# Altium PCB MotorBoard.PcbDoc
Units mil, origin at the board's own origin, x right, y up, seen from the top; angles counter-clockwise.
Board outline 2950 x 3775 mil, 2 copper layers (Top Layer, Bottom Layer); 65 components, 34 nets, 209 pads, 26 vias.
Unrouted connection lines stored in the file: 1.
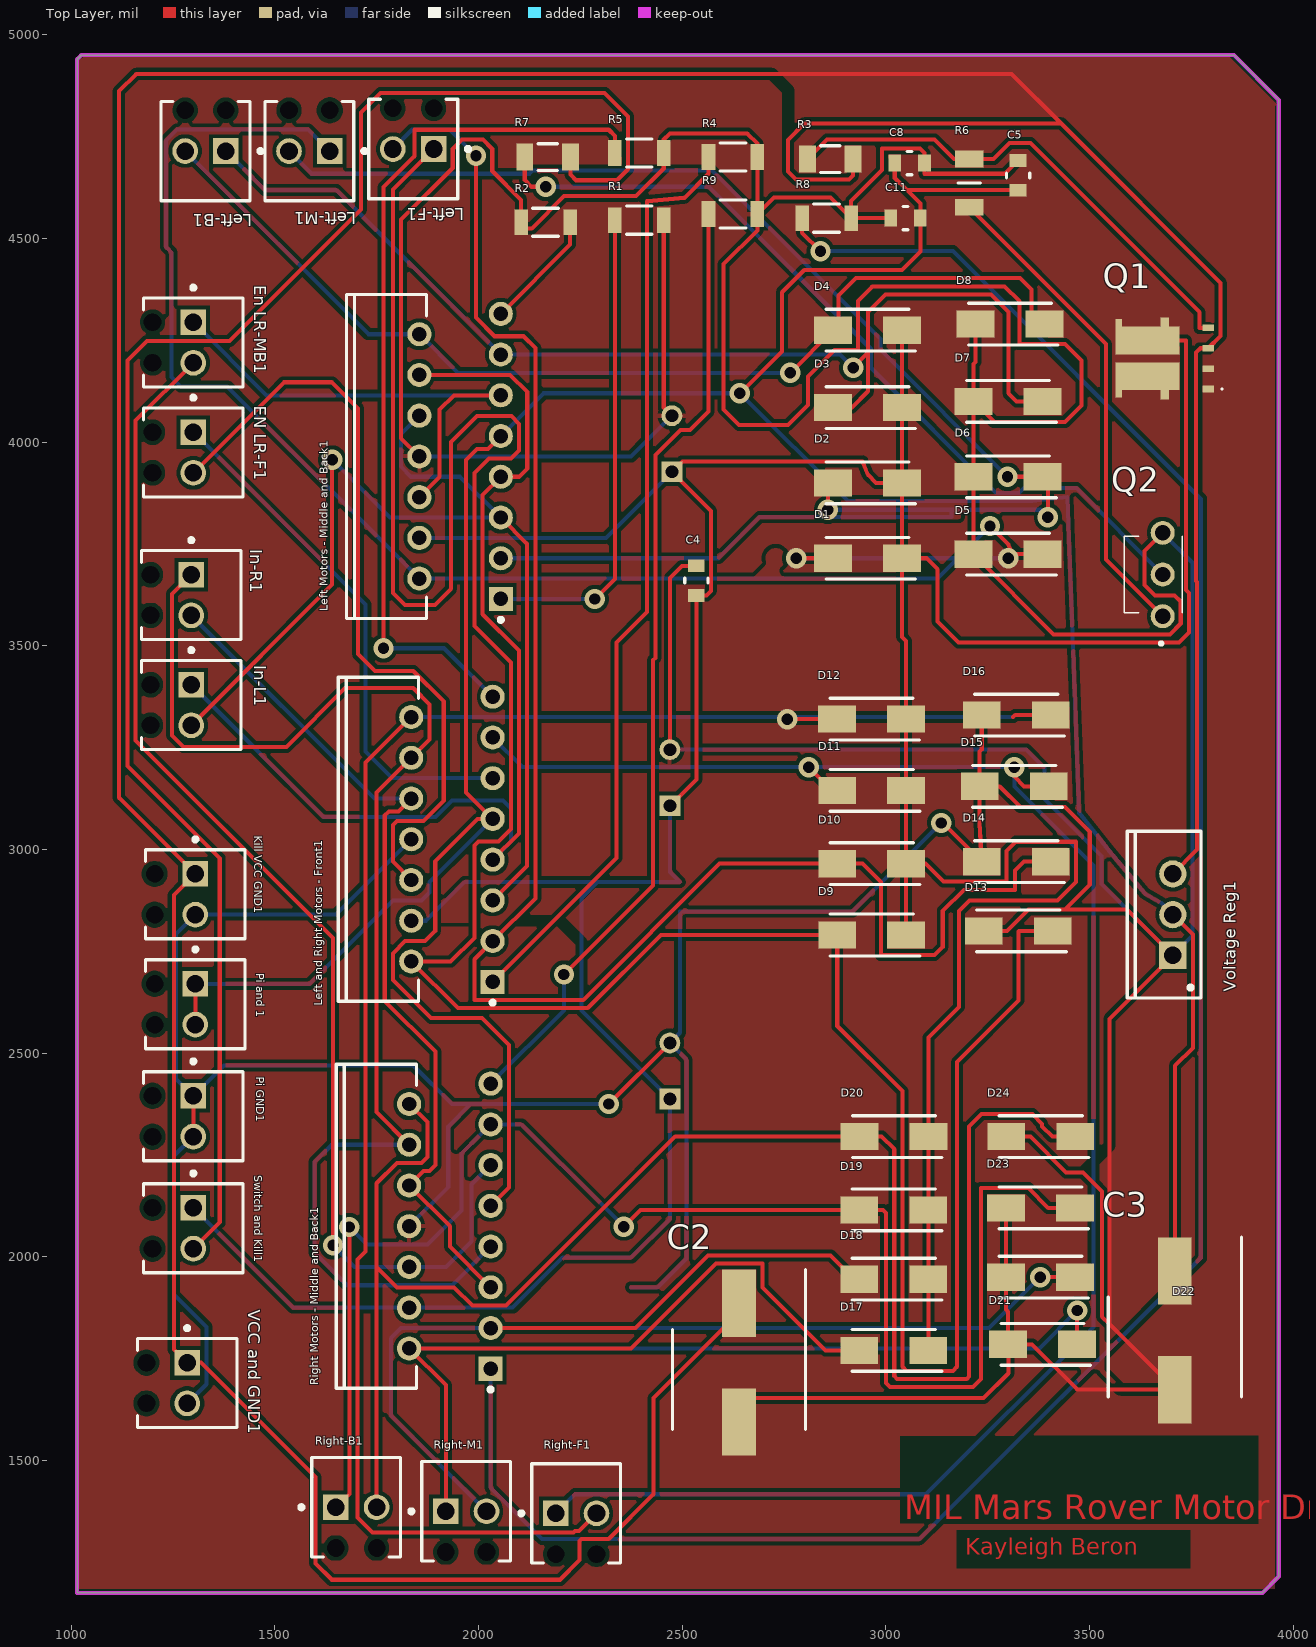
[diagram p0: Top Layer view]
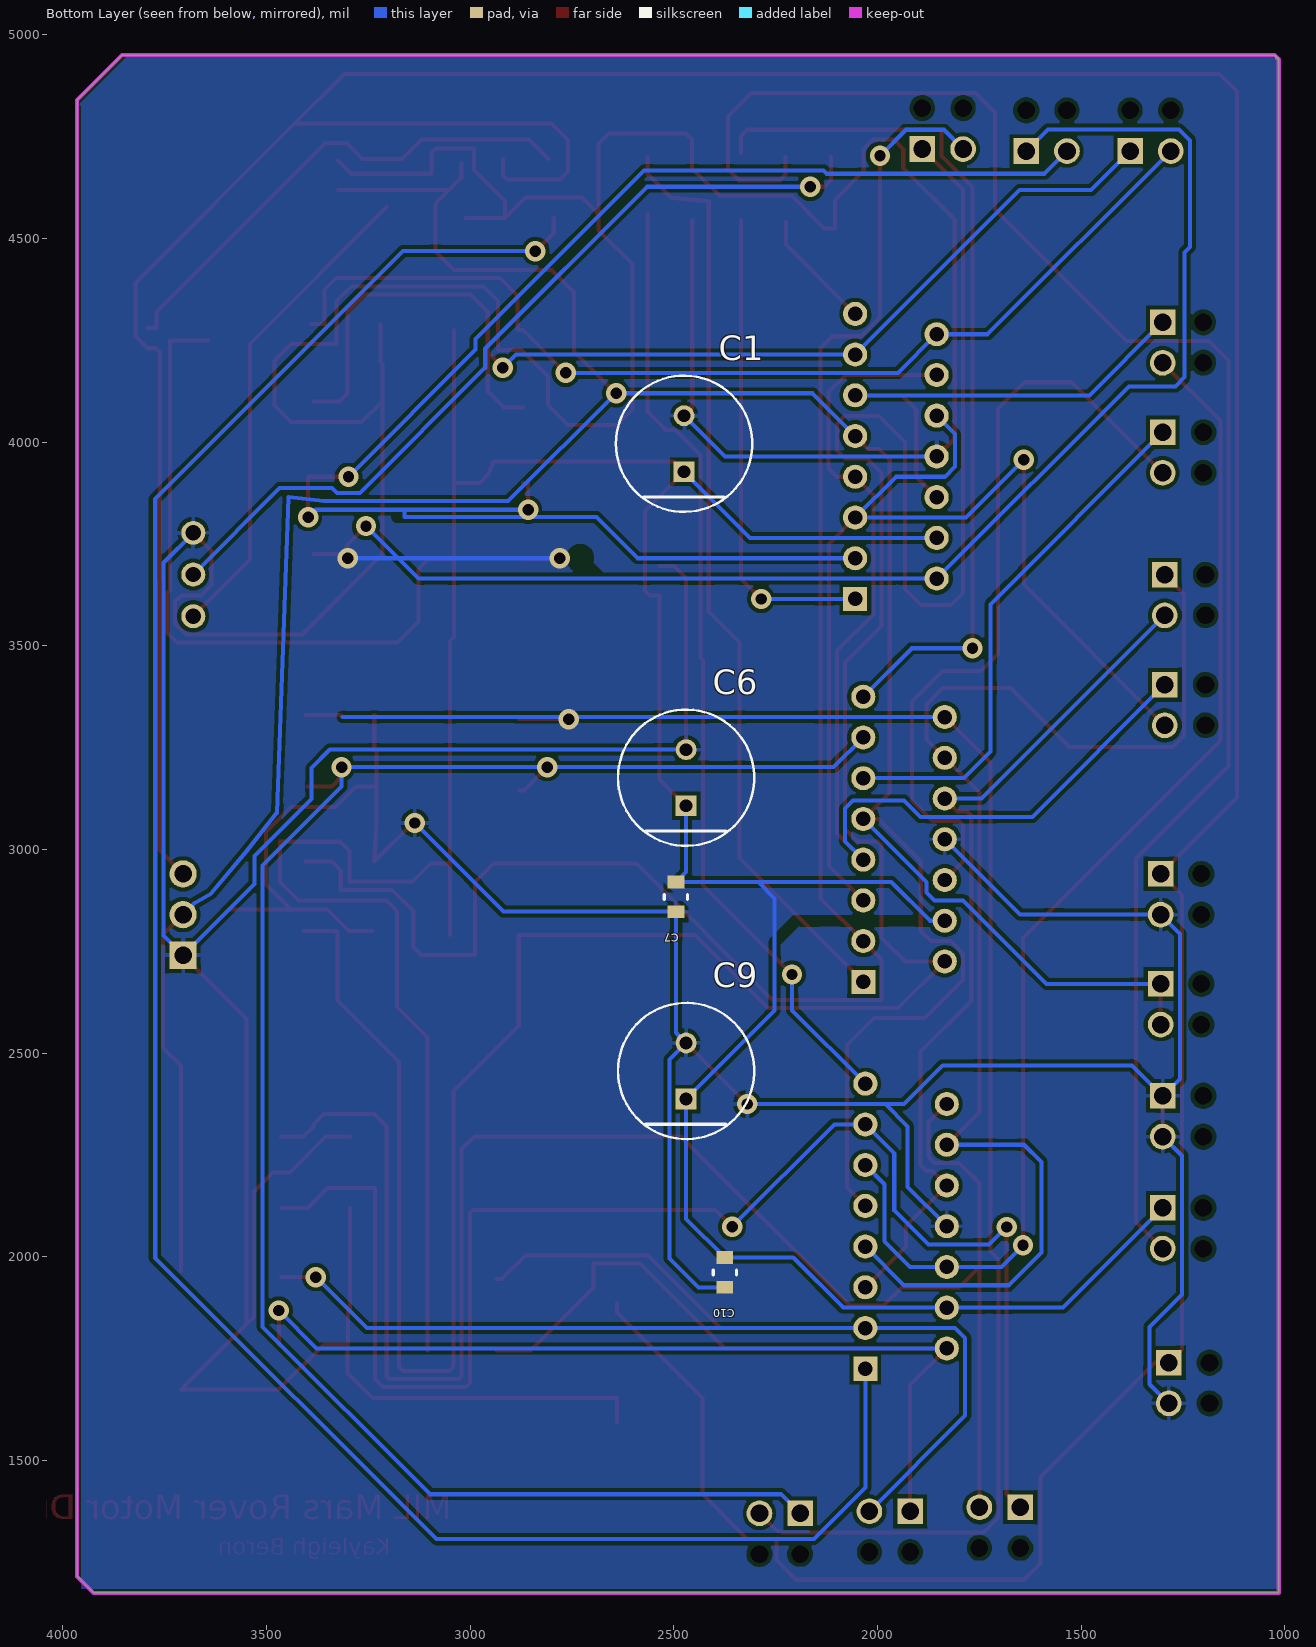
[diagram p1: Bottom Layer view, seen from below]
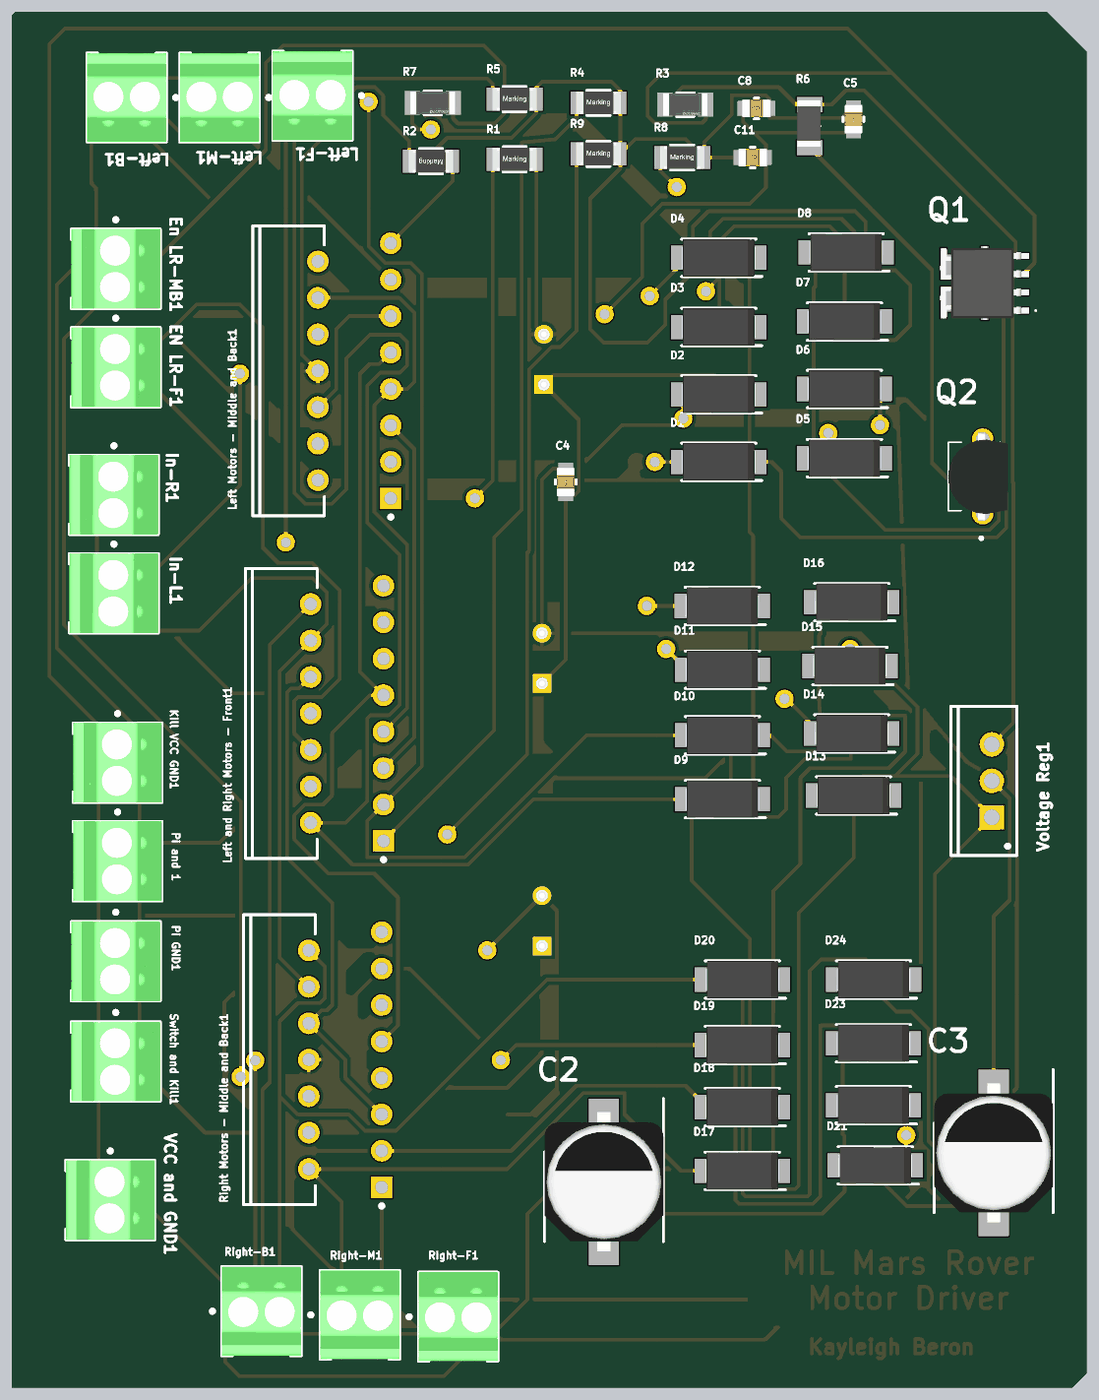
[diagram p2: 3D render of the assembled board from above, using the file's embedded part models]
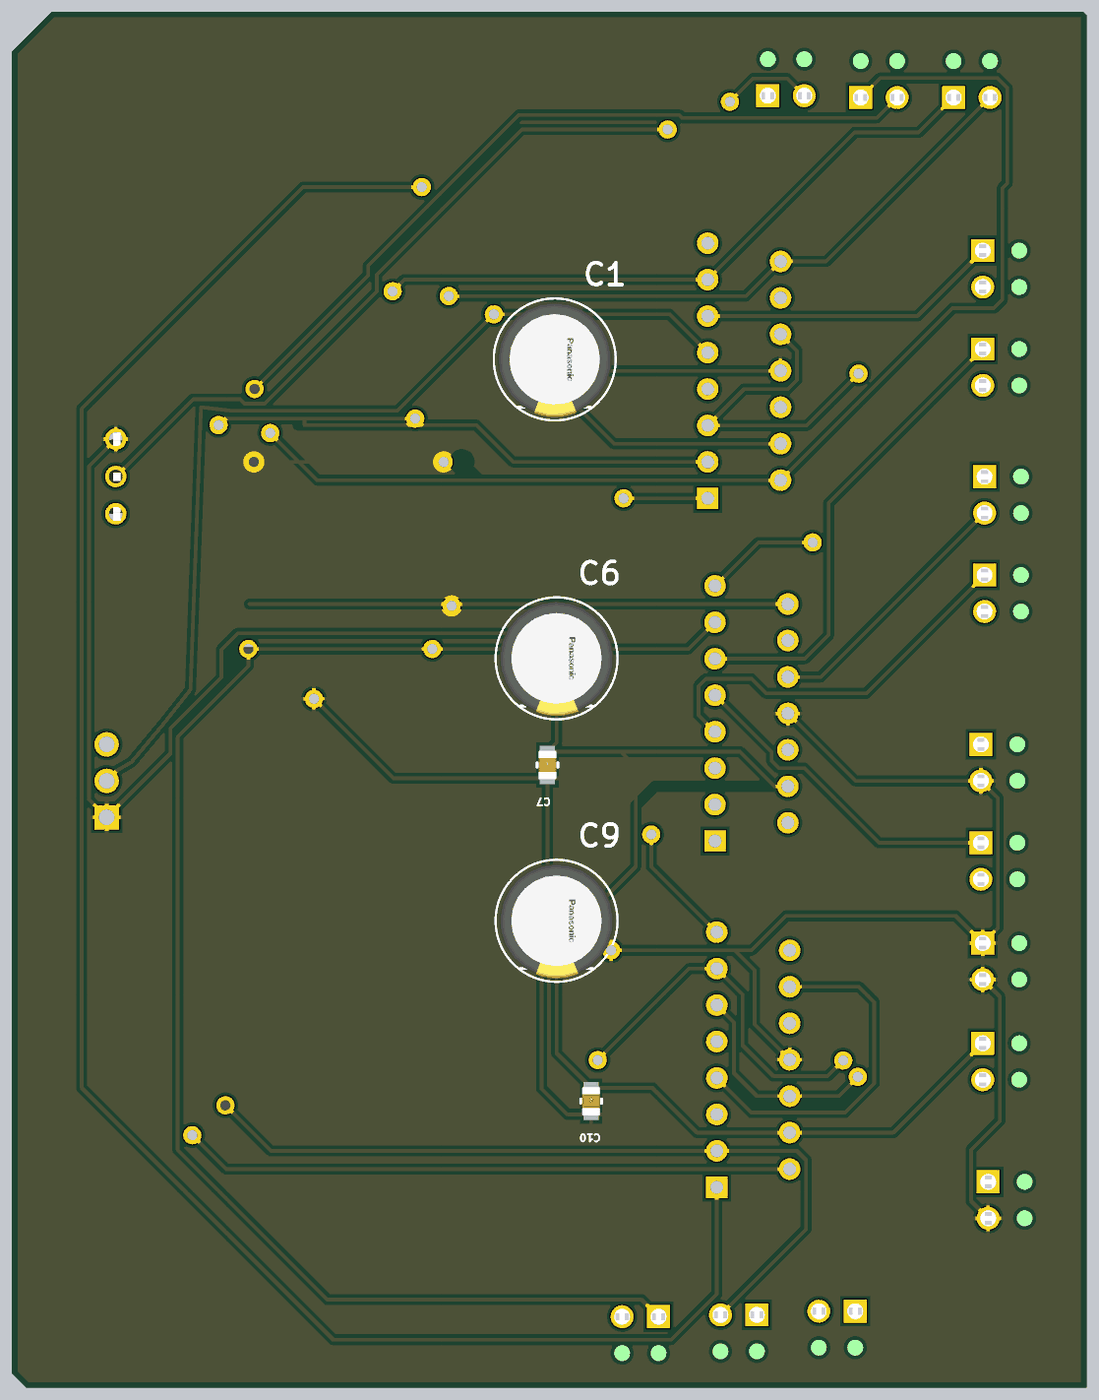
[diagram p3: 3D render of the assembled board from below, using the file's embedded part models]

## Layer stack, top to bottom
Top Solder: solder mask 0.4, Solder Resist, Dk 3.5
Top Layer: signal copper 1.4
Dielectric 1: dielectric 12.6, FR-4, Dk 4.8
Bottom Layer: signal copper 1.4
Bottom Solder: solder mask 0.4, Solder Resist, Dk 3.5

## Board outline
1015,1175 1015,4940 1025,4950 3855,4950 3965,4840 3965,1215 3925,1175

## Design rules (kind name [scope] priority, off if disabled: settings)
Clearance [All] p1: gap=10 ignorepadtopadclearanceinfootprint=FALSE except(0: Arc-Hole Track-Hole SMDPad-Hole THPad-Hole Via-Hole Fill-Hole Poly-Hole Region-Hole Text-Hole)
PolygonConnect [All] p1: connectstyle=Relief reliefconductorwidth=10 reliefentries=4 polygonreliefangle="90 Angle" airgapwidth=10
RoomDefinition PCB1 [InComponentClass('PCB1')] p1: confinementstyle=ConfineIn formatcopy=TRUE lockcomponents=FALSE outline 7405,864.65 25720,864.65 25720,2134.65 7405,2134.65
RoutingVias [All] p1: holewidth=28 width=50 viastyle="Through Hole" minholewidth=28 minwidth=50 maxholewidth=28 maxwidth=50
SolderMaskExpansion [All] p1: expansion=4 istentingtop=FALSE
Width [All] p1: maxlimit=10 minlimit=10 preferedwidth=10
30 further rules are at their usual default settings.

## Components (designator, comment, footprint, x,y, rotation, side; value= is the part's Value field where it differs from the comment)
C1 "EEU-FC1V221L" FP-EEU-FC1V221L-MFG 2475,3996.1 r90 bottom value=220uF
C2 "EEE-TG2A100P" CAPAE830X1050N 2640,1740 r270 top
C3 "EEE-TG2A100P" CAPAE830X1050N 3710,1819.33 r270 top
C4 "100nF" FP-C2012-125-0_2-MFG 2535,3660 r90 top
C5 "100nF" FP-C2012-125-0_2-MFG 3325,4655 r90 top
C6 "EEU-FC1V221L" FP-EEU-FC1V221L-MFG 2470,3176.1 r90 bottom value=220uF
C7 "100nF" FP-C2012-125-0_2-MFG 2495,2883.58 r270 bottom
C8 "100nF" FP-C2012-125-0_2-MFG 3058.58,4685 r0 top
C9 "EEU-FC1V221L" FP-EEU-FC1V221L-MFG 2470,2456.1 r90 bottom value=220uF
C10 "100nF" FP-C2012-125-0_2-MFG 2375,1961.42 r270 bottom
C11 "100nF" FP-C2012-125-0_2-MFG 3048.58,4550 r0 top
D1 "CMR1U-02M_TR13_PBFREE" DIOM5226X262N 2955.35,3715 r180 top
D2 "CMR1U-02M_TR13_PBFREE" DIOM5226X262N 2955.35,3900 r180 top
D3 "CMR1U-02M_TR13_PBFREE" DIOM5226X262N 2955.35,4085 r180 top
D4 "CMR1U-02M_TR13_PBFREE" DIOM5226X262N 2955.35,4275 r180 top
D5 "CMR1U-02M_TR13_PBFREE" DIOM5226X262N 3300.35,3725 r180 top
D6 "CMR1U-02M_TR13_PBFREE" DIOM5226X262N 3300.35,3915 r180 top
D7 "CMR1U-02M_TR13_PBFREE" DIOM5226X262N 3300.35,4100 r180 top
D8 "CMR1U-02M_TR13_PBFREE" DIOM5226X262N 3305,4290 r180 top
D9 "CMR1U-02M_TR13_PBFREE" DIOM5226X262N 2965.35,2790 r180 top
D10 "CMR1U-02M_TR13_PBFREE" DIOM5226X262N 2965.35,2965 r180 top
D11 "CMR1U-02M_TR13_PBFREE" DIOM5226X262N 2965.35,3145 r180 top
D12 "CMR1U-02M_TR13_PBFREE" DIOM5226X262N 2965,3320 r180 top
D13 "CMR1U-02M_TR13_PBFREE" DIOM5226X262N 3325.35,2800 r180 top
D14 "CMR1U-02M_TR13_PBFREE" DIOM5226X262N 3320.35,2970 r180 top
D15 "CMR1U-02M_TR13_PBFREE" DIOM5226X262N 3315.35,3155 r180 top
D16 "CMR1U-02M_TR13_PBFREE" DIOM5226X262N 3320.35,3330 r180 top
D17 "CMR1U-02M_TR13_PBFREE" DIOM5226X262N 3020,1770 r180 top
D18 "CMR1U-02M_TR13_PBFREE" DIOM5226X262N 3020,1945 r180 top
D19 "CMR1U-02M_TR13_PBFREE" DIOM5226X262N 3020,2115 r180 top
D20 "CMR1U-02M_TR13_PBFREE" DIOM5226X262N 3020.35,2295 r180 top
D21 "CMR1U-02M_TR13_PBFREE" DIOM5226X262N 3385,1785 r180 top
D22 "CMR1U-02M_TR13_PBFREE" DIOM5226X262N 3380,1950 r180 top
D23 "CMR1U-02M_TR13_PBFREE" DIOM5226X262N 3380,2120 r180 top
D24 "CMR1U-02M_TR13_PBFREE" DIOM5226X262N 3380.35,2295 r180 top
"EN LR-F1" "1725656" PHOE-1725656-2 1300,3974.65 r270 top
"En LR-MB1" "1725656" PHOE-1725656-2 1300,4244.65 r270 top
In-L1 "1725656" PHOE-1725656-2 1295,3354.65 r270 top
In-R1 "1725656" PHOE-1725656-2 1295,3624.65 r270 top
"Kill VCC GND1" "1725656" PHOE-1725656-2 1305,2890 r270 top
"Left and Right Motors - Front1" "L298N" STM-FM-15 1935,3025 r180 top
"Left Motors - Middle and Back1" "L298N" STM-FM-15 1955,3965 r180 top
Left-B1 "1725656" PHOE-1725656-2 1330,4714.65 r180 top
Left-F1 "1725656" PHOE-1725656-2 1840,4719.65 r180 top
Left-M1 "1725656" PHOE-1725656-2 1585,4714.65 r180 top
"Pi and 1" "1725656" PHOE-1725656-2 1305,2620 r270 top
"Pi GND1" "1725656" PHOE-1725656-2 1300,2345 r270 top
Q1 "SQJ500AEP-T1_GE3" SQJB02ELPT1_GE3 3685,4205.55 r90 top
Q2 "BC549CTA" BC33740TA 3656.97,3639.57 r90 top
R1 "560050332013" WRIS-KSKE_1206_L3.1W1.6H0.6 2395,4545 r0 top
R2 "560050332013" WRIS-KSKE_1206_L3.1W1.6H0.6 2165,4540 r180 top
R3 "RN73H2BTTD2521F100" FP-CR1206-IPC_B 2863.82,4695 r0 top
R4 "560050332013" WRIS-KSKE_1206_L3.1W1.6H0.6 2625,4700 r0 top
R5 "560050332013" WRIS-KSKE_1206_L3.1W1.6H0.6 2395.04,4710 r0 top
R6 "CRCW120621K5FKTA" RESC3216X60N 3205,4635.94 r90 top
R7 "CR1206-JW-103ELF" FP-CR1206-IPC_B 2170,4700 r0 top
R8 "560050332013" WRIS-KSKE_1206_L3.1W1.6H0.6 2855,4550 r0 top
R9 "560050332013" WRIS-KSKE_1206_L3.1W1.6H0.6 2625,4560 r0 top
"Right Motors - Middle and Back1" "L298N" STM-FM-15 1930,2075 r180 top
Right-B1 "1725656" PHOE-1725656-2 1700,1385 r0 top
Right-F1 "1725656" PHOE-1725656-2 2240,1370 r0 top
Right-M1 "1725656" PHOE-1725656-2 1970,1375 r0 top
"Switch and Kill1" "1725656" PHOE-1725656-2 1300,2070 r270 top
"VCC and GND1" "1725656" PHOE-1725656-2 1285,1690 r270 top
"Voltage Reg1" "LD1085V50" TO220 3705,2840 r90 top

## Footprints (in the part's own frame and the unit in brackets; to place one, negate y for a bottom-side part, rotate by r counter-clockwise, add the part's x,y. Pads: shape width x height; smd on the part's side, far side on the other; paste and mask are expansions set on the pad)
BC33740TA [mm]
  round 1.493 hole 0.96: 1(-1.7,-0.585) 2(0.9,-0.585) 3(3.5,-0.585)
  silkscreen extent -3.5,-1.81 3.28,1.81, body extent -2.2,-2.3 3.96,1.83, height 8.67
CAPAE830X1050N [mm]
  rect 4.2x2.1 smd: 1(-3.7,0) 2(3.7,0)
  silkscreen extent -5.8,-4.15 4.15,4.15, body extent 0,0 0,0
DIOM5226X262N [mm]
  rect 2.35x1.7 smd: 1(-2.15,0) 2(2.15,0)
  silkscreen extent -3,-1.3 2.59,1.3, body extent -2.59,-1.3 2.59,1.3, height 2.62
FP-C2012-125-0_2-MFG [mm]
  rect 0.8x1.05 smd paste+0 mask+0: 1(-0.925,0) 2(0.925,0)
  silkscreen extent -0.15,-0.73 0.15,0.73, body extent -1.43,-0.82 1.43,0.82, height 0.25
FP-CR1206-IPC_B [mil]
  rect 41.66x65.44 smd paste+0 mask+0: 1(-56.18,0) 2(56.18,0)
  silkscreen extent -24,-33 24,33, body extent -87,-43 87,43, height 10
FP-EEU-FC1V221L-MFG [mm]
  rect 1.3x1.3 hole 0.8 paste-1000 mask+0: 1(-1.75,0)
  round 1.3 hole 0.8 paste-1000 mask+0: 2(1.75,0)
  silkscreen extent -4.25,-4.25 4.25,4.25, body extent -4,-4 4,4, height 16.5
PHOE-1725656-2 [mm] "Connector, 2-Leads, Body 6.2x5.4mm, Pitch 2.54mm"
  rect 1.6x1.6 hole 1.1: 1(-1.27,0)
  round 1.6 hole 1.1: 2(1.27,0)
  round 0 hole 1.1 unplated: MH1(-1.27,-2.54) MH2(1.27,-2.54)
  silkscreen extent -3.54,-3.1 2.77,3.1, body extent -2.77,-3.1 2.77,3.1, height 9
RESC3216X60N [mm]
  rect 1.05x1.8 smd: 1(-1.5,0) 2(1.5,0)
  silkscreen extent 0,-0.7 0,0.7, body extent -1.42,-0.74 1.78,0.86, height 0.55
SQJB02ELPT1_GE3 [mm]
  rect 0.41x0.72 smd: 1(-1.905,-2.715) 2(-0.635,-2.715) 3(0.635,-2.715) 4(1.905,-2.715)
  rect 1.73x3.99 smd: 5(1.115,1.08) 6(-1.115,1.08)
  rect 0.47x0.41 smd: 7(2.215,2.87) 8(-2.215,2.87)
  rect 0.585x0.51 smd: 9(2.272,0) 10(-2.272,0)
  silkscreen extent -1.95,-3.62 -1.86,-3.52, body extent -2.57,-3.11 2.57,3.12, height 1.17
STM-FM-15 [mm] "FM, 15-Leads, Body 20.2x5mm, Pitch 1.27mm"
  rect 1.5x1.5 hole 0.9: 1(-2.54,8.89)
  round 1.5 hole 0.9: 2(2.54,7.62) 3(-2.54,6.35) 4(2.54,5.08) 5(-2.54,3.81) 6(2.54,2.54) 7(-2.54,1.27) 8(2.54,0) 9(-2.54,-1.27) 10(2.54,-2.54) 11(-2.54,-3.81) 12(2.54,-5.08) 13(-2.54,-6.35) 14(2.54,-7.62) 15(-2.54,-8.89)
  silkscreen extent -2.67,-10.1 7.09,10.31, body extent -2.8,-10.1 7.09,10.1, height 21
TO220 [mm] "TO, Thru-Hole, Vertical, Heatsink Mounted; 3 In-Line Leads; Pitch 2.54 mm"
  rect 1.7x1.7 hole 1.1: 1(-2.54,0)
  round 1.7 hole 1.1: 2(0,0) 3(2.54,0)
  silkscreen extent -5.2,-1.75 5.2,2.85, body extent -5.25,-1.8 5.25,2.9, height 19.7
WRIS-KSKE_1206_L3.1W1.6H0.6 [mm] "Thick Film Resistors, SMT, body size 3.1x1.6mm"
  rect 0.85x1.6 smd: 1(-1.525,0) 2(1.525,0)
  silkscreen extent -0.8,-0.87 0.8,0.87, body extent -1.55,-0.8 1.55,0.8, height 0.6

## Part data
C1 C6 C9: library part CMP-05427-000010-1, "CAP ALUM 220UF 20% 35V RADIAL", Capacitance=220uF, Leakage Current=77uA, Manufacturer="Panasonic Electronic Components", Package=0, Ripple Current=730mA, Temperature="-55°C to +105°C", Temperature Range High=+105°C, Temperature Range Low=-55°C, Tolerance=20%, Voltage Rating=35V, Automotive=Yes, Automotive Grade="Grade 2", Category=Cap, ComponentLink2Description=Datasheet, ComponentLink2URL=https://industrial.panasonic.com/cdbs/www-data/pdf/RDF0000/ABA0000C1209.pdf, Device Class L1="Passive Components", Device Class L2=Capacitors, Device Class L3="Aluminum Electrolytic Capacitors", Digikey Description="CAP ALUM 220UF 20% 35V RADIAL", Dissipation Factor=12%, Esr=0.085Ω, Height=16.5mm, Lead Free=Yes, Life=2000Hours, Manufacturer Part Number=EEU-FC1V221L, Material=Aluminum, Mouser Description="Capacitor; Aluminum Electrolytic; Fc Radial Elec Cap 220uF 35V", Octopart=https://octopart.com/eeu-fc1v221l-panasonic-39478519, RoHS=TRUE
C2 C3: "Capacitor Polarised", Manufacturer_Name=Panasonic, Mouser Part Number=667-EEE-TG2A100P, Arrow Part Number=EEE-TG2A100P, Arrow Price/Stock=https://www.arrow.com/en/products/eee-tg2a100p/panasonic?region=nac, Datasheet Link=http://industrial.panasonic.com/cdbs/www-data/pdf/RDE0000/ABA0000C1187.pdf, Height=10.5mm, Manufacturer_Part_Number=EEE-TG2A100P, Mouser Price/Stock=https://www.mouser.co.uk/ProductDetail/Panasonic/EEE-TG2A100P?qs=aAAGLDy8P2zc4TwQCeoTrg%3D%3D
C4 C5 C7 C8 C10 C11: library part CMP-08246-005122-1, "Multilayer Ceramic Capacitors 100nF ±10% 50V X8R SMD 0805", Case Code (Imperial)=0805, Case Code (Metric)=2012, Dielectric=X8R, Max Operating Temperature=150°C, Min Operating Temperature=-55°C, Package Quantity=1, Resistor Type=Ceramic, Tolerance=10%, Voltage Rating=50V, Capacitance=100nF, Case/Package=0805, Depth=1.25mm, Features="High Temperature", Height=1.25mm, Lead Free="Lead Free", Length=2mm, Mount="Surface Mount", Packaging="Tape and Reel", REACH SVHC="No SVHC", RoHS Compliant=Yes, Series=C, Termination=SMD/SMT, Thickness=0.057inch, Voltage Rating (DC)=50V, Weight=0.000194oz, Width=0.049inch
D1 D2 D3 D4 D5 D6 D7 D8 D9 D10 D11 D12 D13 D14 D15 D16 D17 D18 D19 D20 D21 D22 D23 D24: "Diode", Arrow Part Number="CMR1U-02M TR13 PBFREE", Manufacturer_Name="Central Semiconductor", Mouser Part Number=610-CMR1U-02M, Arrow Price/Stock=https://www.arrow.com/en/products/cmr1u-02m-tr13-pbfree/central-semiconductor?region=nac, Datasheet Link=https://my.centralsemi.com/datasheets/CMR1U01M.PDF, Height=2.62mm, Manufacturer_Part_Number="CMR1U-02M TR13 PBFREE", Mouser Price/Stock=https://www.mouser.co.uk/ProductDetail/Central-Semiconductor/CMR1U-02M-TR13-PBFREE?qs=u16ybLDytRYak6CMIjk9oA%3D%3D
"EN LR-F1" "En LR-MB1" In-L1 In-R1 "Kill VCC GND1" Left-B1 Left-F1 Left-M1 "Pi and 1" "Pi GND1" Right-B1 Right-F1 Right-M1 "Switch and Kill1" "VCC and GND1": library part CMP-2000-05299-1, "Male Header, Pitch 2.54 mm, 1 x 2 Position, Height 9 mm, Tail Length 3.5 mm", Colour=Green, Manufacturer="Phoenix Contact", Content=250pc(s), Datasheet URL=http://datasheet.octopart.com/1725656-Phoenix-Contact-datasheet-5302866.pdf, Datasheet Version=Apr-08, Industrial packaging=Yes, Manufacturer part No.=1725656, Manufacturer URL=http://www.phoenixcontact.com/, Number of contacts=2, Pitch=2.54mm, Type=MPT0,5/2-2,54
"Left and Right Motors - Front1" "Left Motors - Middle and Back1" "Right Motors - Middle and Back1": library part CMP-2000-06526-1, "Dual Full-Bridge Driver, 4.8 to 46 V, -40 to 150 degC, 15-Pin FM (MW 15L), RoHS, Tube", Driver Case Style=Multiwatt, Manufacturer=STMicroelectronics, Operating Temperature Max=130°C, Operating Temperature Min=-25°C, Output Current=2A, Output Voltage=46V, Package Description="15-Pin Flange Mount, Body 5 x 19.6 mm, Pitch 1.27 mm", Package Reference=FM-15, PartNumber=L298, Supply Voltage Max=7V, Supply Voltage Min=4.5V, Automotive Qualification Standard=-, Datasheet URL=https://datasheet.ciiva.com/15109/getdatasheetpartid-50682-15109332.pdf, Datasheet Version=01/2000, Manufacturer URL=http://www.st.com/, Motor Type=FullBridge, Mounting Technology=ThroughHole, MSL=-, No. of Outputs=4Outputs, No. of Pins=15Pins, Packaging=Each, Product Range=-, SVHC=NoSVHC(17-Dec-2015)
Q1: "MOSFET (N-Channel)", Manufacturer_Name=Vishay, Mouser Part Number=78-SQJ500AEP-T1_GE3, Datasheet Link=http://www.mouser.com/ds/2/427/sqj500aep-740737.pdf, Height=1.267mm, Manufacturer_Part_Number=SQJ500AEP-T1_GE3, Mouser Price/Stock=https://www.mouser.com/Search/Refine.aspx?Keyword=78-SQJ500AEP-T1_GE3
Q2: "Transistor BJT NPN", Manufacturer_Name=onsemi, Mouser Part Number=512-BC549CTA, Arrow Part Number=BC549CTA, Arrow Price/Stock=https://www.arrow.com/en/products/bc549cta/on-semiconductor?utm_currency=USD&region=europe, Datasheet Link=https://www.onsemi.com/pub/Collateral/BC550-D.pdf, Manufacturer_Part_Number=BC549CTA, Mouser Price/Stock=https://www.mouser.co.uk/ProductDetail/onsemi-Fairchild/BC549CTA?qs=UMEuL5FsraA9pebzi3Uf7w%3D%3D
R1 R2 R4 R5 R8 R9: library part CMP-03913-100810073-1, "560050332013 Res, R5, 1%, 0.5W, Thick Film, 1206 Rohs Compliant: Yes", Current Rating=1A, Max Operating Temperature=155°C, Min Operating Temperature=-55°C, Resistance=500mΩ, Voltage Rating=500mV, Height=600µm, Length=3.1mm, NexarPartId=100810073, RoHS=Compliant, Width=1.6mm
R3 R7: library part CMP-07231-005593-1, "Thick Film Chip Resistors 1206 10kΩ 0.25W 5% 200ppm/°C", Case Code (Imperial)=1206, Case Code (Metric)=3216, Max Operating Temperature=155°C, Max Power Dissipation=250mW, Min Operating Temperature=-55°C, Package Quantity=1, Resistance=10kR, Temperature Coefficient=200ppm/°C, Tolerance=5%, Voltage Rating=200V, Case/Package=1206, Composition="Thick Film", Contact Plating=Tin, Depth=1.6mm, Features="Moisture Resistant", Height=0.6mm, Length=3.2mm, Military Standard=Not, Mount="Surface Mount", Number of Pins=2, Number of Terminations=2, Packaging="Tape and Reel", Power Rating=250mW, Radiation Hardening=No, REACH SVHC="No SVHC", Termination=SMD/SMT, Thickness=610um, Voltage Rating (DC)=200V, Width=1.6mm
R6: "Resistor", Manufacturer_Name=Vishay, Mouser Part Number=71-CRCW1206-21.5K, Height=0.6mm, Manufacturer_Part_Number=CRCW120621K5FKTA, Mouser Price/Stock=https://www.mouser.co.uk/ProductDetail/Vishay-Dale/CRCW120621K5FKTA?qs=HpYJtD%2F%252BJmJ2NUdKZqmEMg%3D%3D
"Voltage Reg1": library part CMP-0244-00494-1, "3A, Low Drop Positive Voltage Regulator, 5V, 3-Pin TO-220", ComponentLink1Description="Manufacturer URL", ComponentLink1URL=http://www.st.com, ComponentLink2Description=Datasheet, ComponentLink2URL=http://www.st.com/internet/com/TECHNICAL_RESOURCES/TECHNICAL_LITERATURE/DATASHEET/CD00001883.pdf, ComponentLink3Description="Package Specification", ComponentLink3URL=http://www.st.com/internet/com/TECHNICAL_RESOURCES/TECHNICAL_LITERATURE/PACKAGE_INFORMATION/CD00004649.pdf, DatasheetVersion=28/07/2009, PackageDescription="TO, Thru-Hole, Vertical, Heatsink Mounted; 3 In-Line Leads; Pitch 2.54 mm", PackageReference=TO220, PackageVersion=ver3.0

## Via types
v1: diameter 50, hole 28, Top Layer to Bottom Layer, 26 vias

## Nets (pads, with @x,y where several pads share a name; then routed paths per layer and width w, separated by ;. In a path a pad name is that pad's centre, name@x,y a point inside that pad or via, vN(x,y) a via of type N, cw(c..) or ccw(c..) an arc to the next point about the centre after c; other vN are vias at no path point)
+5: "Left and Right Motors - Front1.9" "Left Motors - Middle and Back1.9" "Pi and 1.1" "Pi and 1.2" "Right Motors - Middle and Back1.9" "Voltage Reg1.2" C3.1 C5.1 C8.1 C11.2 | length 8105.7
  Top Layer w10: 1305,2570 1305,2670 ; 2030,2125 2075,2170 2075,2520 2009,2586 1884,2586 1790,2680 1790,2745 1820,2775 1869,2775 1894,2800 1894,2970.89 1998.11,3075 2035,3075 1970,3140 1970,3956.41 1997.03,3983.44 2023.44,3983.44 2055,4015 ; v1(2642,4120) 2745,4223 2745,4368 2800,4423 3040,4423 3085,4468 C11.2 3085,4586 3052.42,4618.58 ; C8.1 3022.17,4648.83 3052.42,4618.58 ; C5.1 3052.42,4618.58 ; 3705,2840 3754,2791 3754,2513 3710,2469 C3.1
  Bottom Layer w10: 1305,2670 1585,2670 1790,2875 1860,2875 1879.53,2894.53 1879.53,2919.53 2035,3075 ; 2055,4015 2160,4120 v1(2642,4120) 2907,3855 3359,3855 3446,3865 3474.9,3090 3550,2995 3636.53,2891.61 3676.85,2868.15 3705,2840
GND: "Kill VCC GND1.2" "Left and Right Motors - Front1.8" "Left Motors - Middle and Back1.8" "Pi GND1.1" "Pi GND1.2" "Right Motors - Middle and Back1.8" "VCC and GND1.2" "Voltage Reg1.1" C1.2 C2.2 C3.2 C4.2 C5.2 C6.2 C7.2 C8.2 C9.2 C10.2 C11.1 D5.2 D6.2 D7.2 D8.2 D13.2 D14.2 D15.2 D16.2 D21.2 D22.2 D23.2 D24.2 Q2.3 R1.2 R2.2 R4.2 R5.2 R8.2 R9.2 | length 21342.5
  Top Layer w10: 1300,2295 1300,2395 ; 1855,3965 1810.47,4009.53 1810.47,4546.47 1937,4673 1937,4720 1960,4743 2011,4743 2034,4720 2034,4665.96 2104.96,4595 R2.2 2104.96,4525 2131,4525 2210,4604 2387,4604 2455.08,4672.08 R5.2 2455.08,4743.08 2470,4758 2660,4758 2685.04,4732.96 R4.2 R9.2 ; v1(2320,2375) C9.2 ; R1.2 2455.04,4084.96 C1.2 ; C6.2 2470,3666.42 2500,3696.42 C4.2 ; C2.2 2640,1653 3240,1653 3301,1714 D21.2@3301,1785 ; C11.1 R8.2 ; v1(3136,3065) 3140.71,3065 D14.2 3230.71,3065 D15.2 ; D8.2 3220.35,4196.65 3215.71,4192 D7.2 ; D16.2 3235.71,3245 3230.71,3240 D15.2 ; D13.2 3298,2800 3351,2853 3440,2853 ; D23.2 D22.2 3295.35,1870 3300.35,1865 D21.2 D21.2@3301,1785 ; D24.2 3355,2295 3443,2207 3484,2207 3531,2160 3531,1852.66 3549,1834.66 ; C5.2 3292.58,4659 3095,4659 C8.2 3095,4710 3084,4721 2991,4721 2991,4667.96 2915.04,4592 R8.2 ; Q2.3 3635.61,3732.97 3635.61,3649.39 3661,3624 3709,3624 3724.39,3608.61 3724.39,3554.25 3698.39,3528.25 3412.46,3528.25 D5.2 D6.2 D7.2 ; R9.2 2685.04,4520 2602,4436.96 2602,4080 2640,4042 2760,4042 2809,4091 2809,4161 2874,4226 2932,4226 2932,4347 2967,4382 3292,4382 3328,4346 3328,4241 3440,4241 3481,4200 3481,4090 3440,4049 3266.71,4049 D7.2 ; R9.2 2726.04,4601 2864.04,4601 R8.2 ; D15.2 3280,3155 3331,3104 3440,3104 3501,3043 3501,2914 3440,2853 ; D21.2@3301,1785 3359,1785 3470.34,1673.66 C3.2 3549,1834.66 ; 3440,2853 3592,2853 3705,2740 3549,2584 3549,1834.66
  Bottom Layer w10: 1285,1640 1332,1687 1332,1828 1253,1907 1253,2248 1300,2295 ; 1830,2075 1926,2171 1926,2320 1981,2375 ; 1835,3025 1650,2840 1305,2840 1258,2793 1258,2437 1300,2395 1375,2470 1840,2470 1935,2375 1981,2375 ; 1855,3965 2375,3965 C1.2 ; v1(2320,2375) 1981,2375 ; C10.2 2440,1925 2511,1996 2511,2484 C9.2 2495,2550 C7.2 2918.17,2847.17 v1(3136,3065) ; C6.2 3345,3245 3390,3200 3390,3124 3530,2984 3530,2915 3705,2740 3753.47,2788.47 3753.47,3703.9 Q2.3
NetD1_2: "Left Motors - Middle and Back1.2" D1.2 D5.1 Left-M1.1 | length 4079.6
  Top Layer w10: v1(2780,3715) D1.2 ; v1(3256,3794) 3301,3749 v1@3311,3725 ; v1(3301,3715) v1@3311,3725 ; D5.1 v1@3311,3725
  Bottom Layer w10: Left-M1.1 1581.65,4768 1260,4768 1233,4741 1233,4479 1246,4466 1246,4160 1269,4137 1383,4137 1855,3665 3127,3665 3177,3715 ; v1(2780,3715) 3177,3715 ; v1(3256,3794) 3177,3715 ; v1(3301,3715) 3177,3715
NetD2_2: "Left Motors - Middle and Back1.3" D2.2 D6.1 Left-M1.2 | length 4107.8
  Top Layer w10: v1(2858,3834) 2858,3900 D2.2 ; v1(3299,3915) D6.1 3398,3915 v1(3398,3816)
  Bottom Layer w10: Left-M1.2 1590.65,4659 2125,4659 2133,4667 2573.1,4667 2987.05,4253.05 2987.05,4226.95 v1(3299,3915) ; 2055,3715 2589,3715 2690,3816 3161.71,3816 3161.71,3834 ; v1(2858,3834) 3161.71,3834 ; v1(3398,3816) 3380,3834 3161.71,3834
NetD3_2: "Left Motors - Middle and Back1.13" D3.2 D7.1 Left-B1.1 | length 2781.5
  Top Layer w10: D3.2 2917,4085 2957,4125 2957,4220 ; v1(2920,4183) 2957,4220 ; D7.1 3321,4100 3301,4120 3301,4320 3259,4362 2999,4362 2957,4320 2957,4220
  Bottom Layer w10: Left-B1.1 1475.65,4619 1651,4619 2055,4215 2888,4215 v1(2920,4183)
NetD4_2: "Left Motors - Middle and Back1.14" D4.2 D8.1 Left-B1.2 | length 2578.1
  Top Layer w10: v1(2765.71,4170) D4.2 2884,4275 2884,4360 2927,4403 3330,4403 3358,4375 3358,4290 D8.1
  Bottom Layer w10: Left-B1.2 1729.65,4265 1855,4265 1950,4170 v1(2765.71,4170)
NetD9_2: "Left and Right Motors - Front1.2" D9.2 D13.1 Left-F1.1 | length 7137.8
  Top Layer w10: Left-F1.1 1790.47,4620.12 1790.47,3629.53 1820,3600 1893,3600 1933,3640 1933,4000 1997,4064 2081,4064 2100,4045 2100,3980 2080,3960 2026,3960 1990,3924 1990,3548.47 2079.53,3458.94 2079.53,3050 2049.53,3020 2000,3020 1990,3010 1990,2783 1932,2725 1835,2725 1949.53,2610.47 2268.45,2610.47 2447.98,2790 D9.2 2881,2790 2881,2567 3041,2407 3041,1730 3051,1720 3165,1720 3175,1730 3175,2478 3326,2629 3326,2799 3327,2800 D13.1
NetD10_2: "Left and Right Motors - Front1.3" D10.2 D14.1 Left-F1.2 | length 4411.4
  Top Layer w10: v1(1994,4703) 1994,4306 2040,4260 2111,4260 2140,4231 2140,2880 2035,2775 1990.47,2730.47 1990.47,2630.47 2257.47,2630.47 2592,2965 D10.2 2943,2965 2988,2920 2988,2741 3120,2741 3140,2761 3140,2848.47 3191.84,2900.3 3317.9,2900.3 3317.9,2947.9 3340,2970 D14.1
  Bottom Layer w10: Left-F1.2 1837.35,4767 1930,4767 v1(1994,4703)
NetD11_2: "Left and Right Motors - Front1.13" D11.2 D15.1 Right-F1.1 | length 4485.6
  Top Layer w10: v1(2811,3202) 2868,3145 D11.2 ; v1(3316,3202) 3316,3179 3340,3155 D15.1
  Bottom Layer w10: 2035,3275 2108,3202 v1(2811,3202) v1(3316,3202) 3316,3155 3510,2961 3510,1828 3099,1417 2237,1417 Right-F1.1
NetD12_2: "Left and Right Motors - Front1.14" D12.2 D16.1 Right-F1.2 | length 4343
  Top Layer w10: 1835,3325 1723,3213 1723,2013 1703,1993 1703,1360 1740,1323 2233.35,1323 2237,1326.65 2246.65,1326.65 Right-F1.2 ; v1(2758,3320) D12.2 ; 3313,3325 3318,3330 D16.1
  Bottom Layer w10: 1835,3325 v1@2753,3325 ; v1(2758,3320) v1@2753,3325 ; 3313,3325 v1@2753,3325
NetD17_2: "Right Motors - Middle and Back1.2" D17.2 D21.1 Right-M1.1 | length 3513.4
  Top Layer w10: Right-M1.1 1920,1685 1830,1775 2374.65,1775 2583,1983.35 2697,1983.35 2697,1925 2852,1770 D17.2 ; D21.1 3470,1785 v1(3470,1868)
  Bottom Layer w10: 1830,1775 3377,1775 v1(3470,1868)
NetD18_2: "Right Motors - Middle and Back1.3" D18.2 D22.1 Right-M1.2 | length 3267.5
  Top Layer w10: 2030,1825 2385.31,1825 2563.66,2003.35 2864.65,2003.35 2923,1945 D18.2 ; v1(3379,1950) D22.1
  Bottom Layer w10: Right-M1.2 1785,1610 1785,1800 1810,1825 2030,1825 3254,1825 v1(3379,1950)
NetD19_2: "Right Motors - Middle and Back1.13" D19.2 D23.1 Right-B1.1 | length 3748.3
  Top Layer w10: Right-B1.1 1683,1418 v1(1683,2073) ; v1(2357,2074) 2398,2115 D19.2 2993,2115 3001,2107 3001,1690 3011,1680 3214,1680 3234,1700 3234,2169 3350,2169 3399,2120 D23.1
  Bottom Layer w10: v1(1683,2073) 1726,2030 1875,2030 1959,2114 1959,2254 2030,2325 2106,2325 v1(2357,2074)
NetD20_2: "Right Motors - Middle and Back1.14" D20.2 D24.1 Right-B1.2 | length 4249.4
  Top Layer w10: Right-B1.2 1750,1975 ; 1830,2375 1874.53,2330.47 1874.53,2245 1860,2230.47 1800,2230.47 1750,2180.47 1750,1975 ; D24.1 3409,2295 3384,2320 3384,2326 3360,2350 3235,2350 3205,2320 3205,1706 3199,1700 3028,1700 3021,1707 3021,2264 2990,2295 D20.2 2483.21,2295 2068.21,1880 1985,1880 1940,1925 1800,1925 1750,1975
"NetEN LR-F1_1": "EN LR-F1.1" "Left and Right Motors - Front1.11" | length 1298.8
  Bottom Layer w10: 1300,4024.65 1723,3601.65 1723,3240 1788,3175 2035,3175
"NetEN LR-F1_2": "EN LR-F1.2" "Left and Right Motors - Front1.6" | length 1931.6
  Top Layer w10: 1300,3924.65 1522.35,4147 1640,4147 1704,4083 1704,3480 1746,3438 1840,3438 1915,3363 1915,3120 1865,3070 1800,3070 1790,3060 1790,2970 1835,2925
"NetEn LR-MB1_1": "En LR-MB1.1" "Left Motors - Middle and Back1.6" "Left Motors - Middle and Back1.11" | length 1229.6
  Top Layer w10: 1855,3865 1905,3915 1905,4080 1940,4115 2055,4115
  Bottom Layer w10: 1300,4294.65 1479.65,4115 2055,4115
"NetEn LR-MB1_2": "En LR-MB1.2" "Right Motors - Middle and Back1.6" "Right Motors - Middle and Back1.11" | length 3020.9
  Top Layer w10: 1300,4194.65 1158,4052.65 1158,3267.58 1643,2782.58 v1(1643,2028)
  Bottom Layer w10: v1(1643,2028) 1696,1975 1830,1975 1920,1975 1983,2038 1983,2178 2030,2225
NetIn-L1_1: "Left and Right Motors - Front1.7" "Left Motors - Middle and Back1.7" "Left Motors - Middle and Back1.12" In-L1.1 | length 2654.1
  Top Layer w10: 1855,4165 2078,4165 2120,4123 2120,3935 2100,3915 2055,3915 2010,3870 2010,3577.5 2099.53,3487.97 2099.53,3039.53 2035,2975
  Bottom Layer w10: In-L1.1 1619.65,3080 1895,3080 1935,3120 2060,3120 2080,3100 2080,3020 2035,2975
NetIn-L1_2: "Left and Right Motors - Front1.5" "Left Motors - Middle and Back1.5" "Left Motors - Middle and Back1.10" In-L1.2 | length 2710.6
  Top Layer w10: In-L1.2 1641,3650.65 v1(1641,3957) ; 2035,2875 2119.53,2959.53 2119.53,3750.47 2055,3815
  Bottom Layer w10: v1(1641,3957) 1783,3815 2055,3815 1955,3915 1835,3915 1810,3940 1810,4020 1855,4065
NetIn-R1_1: "Left and Right Motors - Front1.12" "Right Motors - Middle and Back1.7" "Right Motors - Middle and Back1.12" In-R1.1 | length 3278.8
  Top Layer w10: In-R1.1 1248,3627.65 1248,3280 1276,3252 1529,3252 1673,3396 1840,3396 1880,3356 1880,3270 1835,3225 1750,3140 1750,2355 1830,2275
  Bottom Layer w10: 1830,2275 1640,2275 1598,2233 1598,2010 1678,1930 1935,1930 2030,2025
NetIn-R1_2: "Left and Right Motors - Front1.10" "Right Motors - Middle and Back1.5" "Right Motors - Middle and Back1.10" In-R1.2 | length 2136.6
  Top Layer w10: 1835,3125 1803.44,3093.44 1780,3093.44 1770,3083.44 1770,2628.25 1894.53,2503.73 1894.53,2225 1880,2210.47 1865.47,2210.47 1830,2175 1930,2075 1930,2025 2030,1925
  Bottom Layer w10: In-R1.2 1744.65,3125 1835,3125
"NetLeft and Right Motors - Front1_1": "Left and Right Motors - Front1.1" R4.1 | length 2290
  Top Layer w10: 2035,2675 2339,2979 2339,3508 2414.41,3583.41 2414.41,4591.41 2506,4600 2564.96,4658.96 R4.1
"NetLeft and Right Motors - Front1_15": "Left and Right Motors - Front1.15" R5.1 | length 2162
  Top Layer w10: v1(1767,3494) 1767,4626 1843,4702 1843,4767 2320,4767 2335,4752 R5.1
  Bottom Layer w10: v1(1767,3494) 1916,3494 2035,3375
"NetLeft Motors - Middle and Back1_1": "Left Motors - Middle and Back1.1" R1.1 | length 1181.3
  Top Layer w10: v1(2286,3615) 2334.96,3663.96 R1.1
  Bottom Layer w10: 2055,3615 v1(2286,3615)
"NetLeft Motors - Middle and Back1_15": "Left Motors - Middle and Back1.15" R2.1 | length 295.4
  Top Layer w10: 2055,4315 2225.04,4485.04 R2.1
NetQ1_4: Q1.4 R3.1 R6.2 | length 1250.5
  Top Layer w10: R3.1 2855.64,4743 3120,4743 3168,4695 R6.2 3265,4695 3304,4734 3355,4734 3770,4319 3770,4280.55 Q1.4
NetQ2_1: Q2.1 R6.1 | length 1201
  Top Layer w10: R6.1 3541,4240.89 3541,3711.64 Q2.1
NetQ2_2: Q2.2 R7.1 | length 2061.3
  Top Layer w10: R7.1 2113.82,4643.18 2130,4627 v1(2165,4627)
  Bottom Layer w10: v1(2165,4627) 2565.56,4627 2963.28,4229.28 2963.28,4182.72 3271,3875 3327,3875 3339,3887 3468,3887 Q2.2
NetR7_2: "Switch and Kill1.2" R7.2 | length 4296
  Top Layer w10: 1300,2020 1365,2085 1365,2978 1138,3205 1138,4200 1186,4248 1389,4248 1712,4571 1712,4809 1760,4857 2310,4857 2367,4800 2367,4670 2340,4643 2240,4643 2226.18,4656.82 R7.2
NetR8_1: "Right Motors - Middle and Back1.1" R8.1 | length 5521.9
  Top Layer w10: R8.1 2794.96,4514.04 v1(2840,4469)
  Bottom Layer w10: 2030,1725 2030,1433 2156,1307 3083,1307 3773.47,1997.47 3773.47,3860.53 3165,4469 v1(2840,4469)
NetR9_1: "Right Motors - Middle and Back1.15" R9.1 | length 2370.4
  Top Layer w10: v1(2210,2693) 2429,2912 2429,3465 2434.41,3470.41 2434.41,3968 2496.41,4030 2520,4030 2564.96,4074.96 R9.1
  Bottom Layer w10: 2030,2425 2210,2605 v1(2210,2693)
VCC: "Kill VCC GND1.1" "VCC and GND1.1" "Voltage Reg1.3" C2.1 Q1.3 R3.2 | length 10818
  Top Layer w10: C2.1 2640,1863 2430,1653 2430,1417 2320,1307 2253,1307 2248,1302 2248,1255 2200,1207 1640,1207 1600,1247 1600,1459 1319,1740 1285,1740 1253,1772 1253,2888 1305,2940 1118,3127 1118,4862 1160,4904 3309,4904 3431,4782 ; R3.2 2920,4655 2910,4645 2780,4645 2760,4665 2760,4742 2800,4782 3431,4782 ; 3705,2940 3764.39,2999.39 3764.39,3657.03 3762,3659.42 3762,4220 3772.55,4230.55 Q1.3 3822,4260.66 3822,4391 3431,4782
VCC_Switch: "Left and Right Motors - Front1.4" "Left Motors - Middle and Back1.4" "Right Motors - Middle and Back1.4" "Switch and Kill1.1" C1.1 C4.1 C6.1 C7.1 C9.1 C10.1 D1.1 D2.1 D3.1 D4.1 D9.1 D10.1 D11.1 D12.1 D17.1 D18.1 D19.1 D20.1 Q1.5 | length 10626.5
  Top Layer w10: C6.1 2535,3172.2 C4.1 2560,3623.58 2571,3634.58 2571,3831.2 C1.1 2500.8,3953 2943,3953 2956,3920 2976,3900 D2.1 ; D4.1 D3.1 D2.1 ; D9.1 D10.1 ; D17.1 D18.1 D19.1 3104.65,2204 3105,2204.35 D20.1 3105,2538.55 3179.45,2613 3179.45,2848.47 3205.98,2875 3422,2875 3467,2920 3467,3019 3320,3019 3297,2996 3297,2921 3142,2921 3098,2965 D10.1 ; Q1.5 3737,4249.45 3737,3637.03 3744.39,3629.64 3744.39,3532.64 3720,3508.25 3178.75,3508.25 3127,3560 3127,3688 3100,3715 D1.1 ; D1.1 D2.1 ; D1.1 3040,3521.65 3049.65,3512 D12.1 3049.65,3145 D11.1 D10.1
  Bottom Layer w10: 1300,2120 1545,1875 1830,1875 2084.16,1875 2207,1997.84 C10.1 2470,2092.84 C9.1 2252.63,2604.57 2252.63,2880 2292.63,2920 ; 1835,2825 1871.38,2825 1966.38,2920 2292.63,2920 ; 1855,3765 2312.8,3765 C1.1 ; C6.1 2470,2945 C7.1 2292.63,2920
pads on no net: "EN LR-F1.MH1" "EN LR-F1.MH2" "En LR-MB1.MH1" "En LR-MB1.MH2" "Kill VCC GND1.MH1" "Kill VCC GND1.MH2" "Pi and 1.MH1" "Pi and 1.MH2" "Pi GND1.MH1" "Pi GND1.MH2" "Switch and Kill1.MH1" "Switch and Kill1.MH2" "VCC and GND1.MH1" "VCC and GND1.MH2" In-L1.MH1 In-L1.MH2 In-R1.MH1 In-R1.MH2 Left-B1.MH1 Left-B1.MH2 Left-F1.MH1 Left-F1.MH2 Left-M1.MH1 Left-M1.MH2 Q1.1 Q1.2 Q1.6 Q1.7 Q1.8 Q1.9 Q1.10 Right-B1.MH1 Right-B1.MH2 Right-F1.MH1 Right-F1.MH2 Right-M1.MH1 Right-M1.MH2

## Polygon pours and split planes (outlines as drawn)
no net on Multi-Layer "NONET_L02_P-001" (solid): 1030,4945 3845,4945 3960,4830 3955,4825 3955,1185 1020,1185 1010,1195 1015,1200 1015,4935
GND on Bottom Layer "GND_L02_P000" (solid, pour order 0): 3845,4950 3850,4955 3965,4840 3965,1215 3925,1175 1015,1175 1015,4940 1025,4950 1015,4940 1025,4950
GND on Top Layer "GND_L01_P001" (solid, pour order 1): 1015,1190 3940,1190 3950,1180 3960,1190 3960,4840 3935,4840 3825,4950 3805,4930 1025,4930 1025,1190 1020,1185

## Keep-outs
Keep-Out Layer:
  the board outline again, w10

## Other copper
Top Layer:
  text "MIL Mars Rover Motor Driver" at 3045,1355 h60
  text "Kayleigh Beron" at 3195,1268.33 h40